# Altium PCB CY8C4245LQI-BoB.PcbDoc
Units mm, origin at the board's own origin, x right, y up, seen from the top; angles counter-clockwise.
Board outline 19.05 x 50.16 mm, 2 copper layers (Top, Bottom), stack 1.67 mm thick; 17 components, 41 nets, 100 pads, 17 vias.
Unrouted connection lines stored in the file: 26.
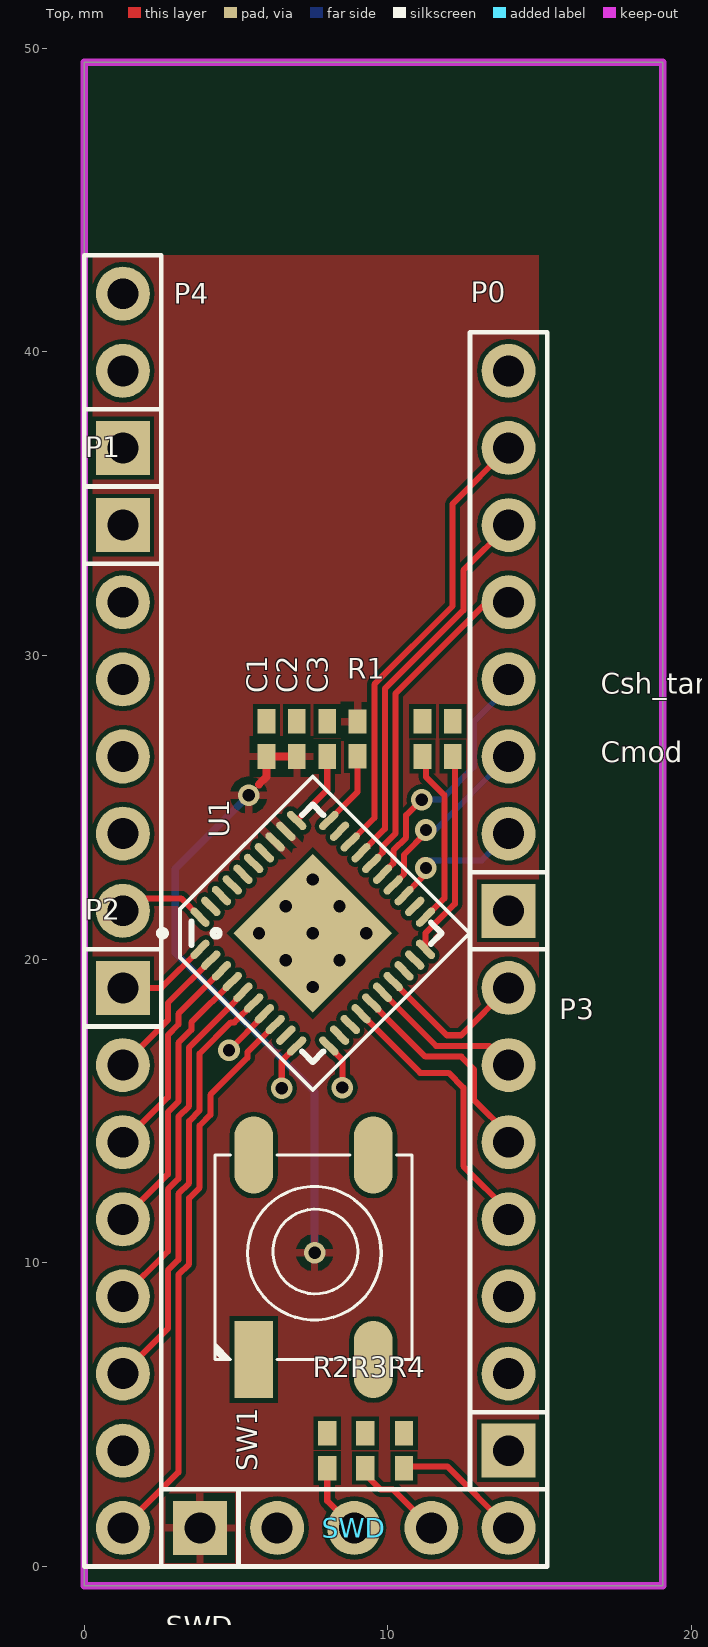
[diagram p0: Top view]
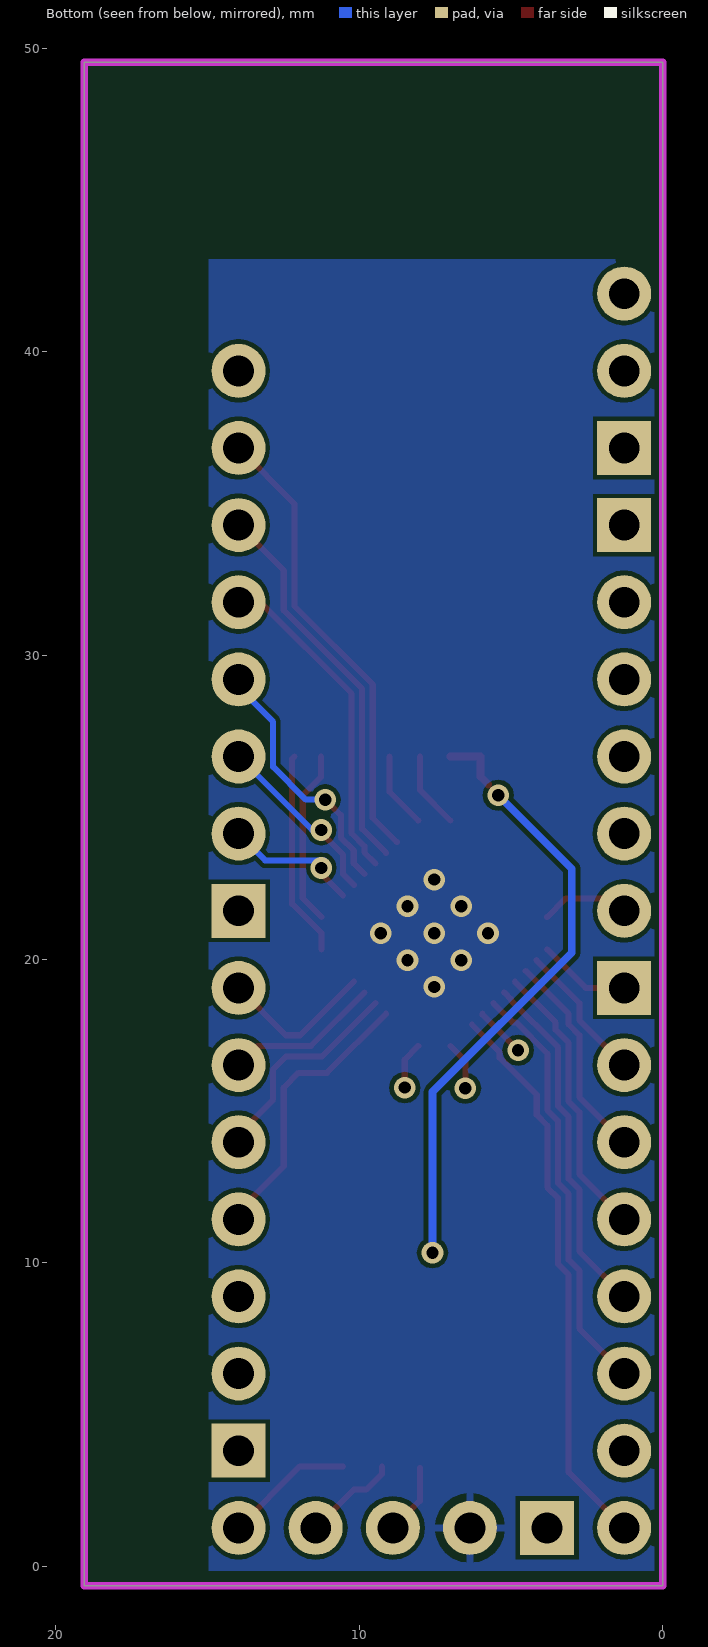
[diagram p1: Bottom view, seen from below]

## Layer stack, top to bottom
Top Solder: solder mask 0.0102, Solder Resist, Dk 3.5
Top: signal copper 0.035
Dielectric1: core 1.6, FR-4, Dk 4.58
Bottom: signal copper 0.035
Bottom Solder: solder mask 0.0102, Solder Resist, Dk 3.5

## Board outline
0,-0.635 0,49.53 19.05,49.53 19.05,-0.635

## Design rules (kind name [scope] priority, off if disabled: settings)
Clearance [All] p1: gap=0.15
Clearance ClearanceViaPad [IsVia vs IsPad] p2: gap=0.1
Clearance ClearanceGNDpolygons [InPolygonClass('GNDpolygons')] p3: gap=0.3
Clearance ClearanceTechnology [All] p4: gap=0.2
ComponentClearance [All] p1: gap=0 collisioncheckmode=3 verticalgap=0.254 showdistances=TRUE
MinimumAnnularRing [All] p1: minimumring=0.2
MinimumSolderMaskSliver MinimumSolderMaskSliver_QFN48 [All] p1: minsoldermaskwidth=0
MinimumSolderMaskSliver [All] p2: minsoldermaskwidth=0.254
PolygonConnect [All] p1: connectstyle=Relief reliefconductorwidth=0.254 reliefentries=4 polygonreliefangle="90 Angle" airgapwidth=0.254
PolygonConnect PolygonConnectVia [IsVia] p2: connectstyle=Direct reliefconductorwidth=0.4 reliefentries=4 polygonreliefangle="90 Angle" airgapwidth=0.254
PolygonConnect PolygonConnectBigPads [(ObjectKind = 'Pad') And ((AsMM(PadXSize_AllLayers) > 2) Or (AsMM(PadYSize_AllLayers) > 2))] p3: connectstyle=Direct reliefconductorwidth=0.4 reliefentries=4 polygonreliefangle="90 Angle" airgapwidth=0.254
PolygonConnect PolygonConnectGeneral [All] p4: connectstyle=Relief reliefconductorwidth=0.3 reliefentries=4 polygonreliefangle="90 Angle" airgapwidth=0.2
RoutingVias [All] p1: holewidth=0.2 width=0.3 viastyle="Through Hole" minholewidth=0.711 minwidth=1.27 maxholewidth=0.711 maxwidth=1.27
SilkToSolderMaskClearance [IsPad] p1: minsilkscreentomaskgap=0.05 clearancetoexposedcopper=TRUE
SilkToSolderMaskClearance SilkscreenOverComponentPads [IsPad] p2: minsilkscreentomaskgap=0.1 clearancetoexposedcopper=FALSE
SolderMaskExpansion [All] p1: expansion=0.102
Width [All] p1: maxlimit=0.406 minlimit=0.152 preferedwidth=0.203
Width WidthTechnology [All] p2: maxlimit=3 minlimit=0.16 preferedwidth=0.6
26 further rules are at their usual default settings.

## Components (designator, comment, footprint, x,y, rotation, side; value= is the part's Value field where it differs from the comment)
C1 "1.0µF" CAPC1005X06N 6,27.25 r90 top
C2 "0.1µF" CAPC1005X06N 7,27.25 r90 top
C3 "1.0µF" CAPC1005X06N 8,27.25 r90 top
Cmod "2200pF" CAPC1005X06N 12.13,27.25 r90 top
Csh_tank "10000pF" CAPC1005X06N 11.136,27.25 r90 top
P0 "HEADER-1X8" HEADER-1X8-100MIL 13.97,21.59 r180 top
P1 "HEADER-1X6" HEADER-1X6-100MIL 1.27,34.29 r0 top
P2 "HEADER-1X8" HEADER-1X8-100MIL 1.27,19.05 r0 top
P3 "HEADER-1X7" HEADER-1X7-100MIL 13.97,3.81 r180 top
P4 "HEADER-1X3" HEADER-1X3-100MIL 1.27,36.83 r180 top
R1 "10k" RESC1005X04N 9,27.25 r270 top
R2 "0.0" RESC1005X04N 8,3.81 r90 top
R3 "0.0" RESC1005X04N 9.25,3.81 r90 top
R4 "0.0" RESC1005X04N 10.528,3.81 r90 top
SW1 "SW-PB6MM-SMD" SW-PB-SMD 5.578,6.814 r90 top
SWD "HEADER-1X5" HEADER-1X5-100MIL 3.81,1.27 r90 top
U1 "CY8C4245LQI-483" CY8C4xxxLQI 3.81,20.32 r45 top

## Footprints (in the part's own frame and the unit in brackets; to place one, negate y for a bottom-side part, rotate by r counter-clockwise, add the part's x,y. Pads: shape width x height; smd on the part's side, far side on the other; paste and mask are expansions set on the pad)
CAPC1005X06N [mm] "Chip Capacitor, 2-Leads, Body 1.00x0.50mm, IPC Medium Density"
  rect 0.82x0.58 smd: 1(-0.58,0) 2(0.58,0)
  body extent -0.52,-0.28 0.53,0.27, height 0.55
CY8C4xxxLQI [mm] "PSOC4 QFN package"
  oval 0.8x0.25 smd mask+0.05: 1(0,0) 2(0,-0.5) 3(0,-1) 4(0,-1.5) 5(0,-2) 6(0,-2.5) 7(0,-3) 8(0,-3.5) 9(0,-4) 10(0,-4.5) 21(6,-4.5) 22(6,-4) 23(6,-3.5) 24(6,-3) 25(6,-2.5) 26(6,-2) 27(6,-1.5) 28(6,-1) 29(6,-0.5) 30(6,0)
  oval 0.25x0.8 smd mask+0.05: 11(0.75,-5.25) 12(1.25,-5.25) 13(1.75,-5.25) 14(2.25,-5.25) 15(2.75,-5.25) 16(3.25,-5.25) 17(3.75,-5.25) 18(4.25,-5.25) 19(4.75,-5.25) 20(5.25,-5.25) 31(5.25,0.75) 32(4.75,0.75) 33(4.25,0.75) 34(3.75,0.75) 35(3.25,0.75) 36(2.75,0.75) 37(2.25,0.75) 38(1.75,0.75) 39(1.25,0.75) 40(0.75,0.75)
  rect 3.7x3.7 smd mask+0.1: EP(3,-2.25)
  silkscreen extent -0.65,-5.9 6.65,1.4, body extent 0,-5.25 6,0.75, height 1
HEADER-1X3-100MIL [mil]
  rect 70x70 hole 40: 1(0,0)
  round 70 hole 40: 2(0,-100) 3(0,-200)
  silkscreen extent -50,-250 50,50, body extent -50,-250 50,50, height 470
HEADER-1X5-100MIL [mil]
  rect 70x70 hole 40: 1(0,0)
  round 70 hole 40: 2(0,-100) 3(0,-200) 4(0,-300) 5(0,-400)
  silkscreen extent -50,-450 50,50, body extent -45,-445 45,45, height 470
HEADER-1X6-100MIL [mil]
  rect 70x70 hole 40: 1(0,0)
  round 70 hole 40: 2(0,-100) 3(0,-200) 4(0,-300) 5(0,-400) 6(0,-500)
  silkscreen extent -50,-550 50,50, body extent -50,-550 50,50, height 470
HEADER-1X7-100MIL [mil]
  rect 70x70 hole 40: 1(0,0)
  round 70 hole 40: 2(0,-100) 3(0,-200) 4(0,-300) 5(0,-400) 6(0,-500) 7(0,-600)
  silkscreen extent -50,-650 50,50, body extent -50,-650 50,50, height 470
HEADER-1X8-100MIL [mil]
  rect 70x70 hole 40: 1(0,0)
  round 70 hole 40: 2(0,-100) 3(0,-200) 4(0,-300) 5(0,-400) 6(0,-500) 7(0,-600) 8(0,-700)
  silkscreen extent -50,-750 50,50, body extent -49,-749 49,49, height 470
RESC1005X04N [mm] "Chip Resistor, 2-Leads, Body 1.00x0.50mm, IPC Medium Density"
  rect 0.8x0.6 smd: 1(-0.575,0) 2(0.575,0)
  body extent -0.53,-0.28 0.53,0.27, height 0.4
SW-PB-SMD [mil]
  rect 100x50 smd: 1(0,0)
  oval 100x50 smd: 2(265,0) 3(0,-155) 4(265,-155)
  silkscreen extent 0,-205 265,50, body extent -28,-206 297,50, height 140

## Part data
C1 C3: library part C0402C105K8PACTU, "CAP CER 1UF 10V 10% X5R 0402"
C2: library part C0402C104K9RACTU, "CAP CER 0.1UF 6.3V 10% X7R 0402"
Cmod: library part C0402C222K4RACTU, "CAP CER 2200PF 16V 10% X7R 0402"
Csh_tank: library part C0402C103K4RACTU, "CAP CER 10000PF 16V 10% X7R 0402"
P0 P2: library part HEADER-1X8-100MIL
P1: library part HEADER-1X6-100MIL
P3: library part HEADER-1X7-100MIL
P4: library part HEADER-1X3-100MIL
R1: library part CRCW040210K0FKED, "RES 10.0K OHM 1/16W 1% 0402 SMD"
R2 R3 R4: library part CRCW04020000Z0ED, "RES 0.0 OHM 1/16W JUMP 0402 SMD"
SW1: "PUSHBUTTON SWITCH 6MM SMD"
SWD: library part CONN-1X5-100MIL-SWD-MiniProg
U1: library part CY8C4245LQI, "PSOC4 IC MCU 32BIT 32KB FLASH 40QFN"

## Via types
v1: diameter 0.711, hole 0.406, Top to Bottom, 17 vias

## Nets (pads, with @x,y where several pads share a name; then routed paths per layer and width w, separated by ;. In a path a pad name is that pad's centre, name@x,y a point inside that pad or via, vN(x,y) a via of type N, cw(c..) or ccw(c..) an arc to the next point about the centre after c; other vN are vias at no path point)
GND: C1.2 C2.2 C3.2 Cmod.2 Csh_tank.2 SW1.4 SWD.2 U1.9 U1.34 U1.EP
  other v1: 7.522,19.083 6.638,19.966 8.406,19.966 5.755,20.85 7.522,20.85 9.29,20.85 6.638,21.734 8.406,21.734 7.522,22.618
NetC3_1: C3.1 U1.31 | length 2.5
  Top w0.2: U1.31 8,25.571 C3.1
NetR2_1: R2.1 SWD.3 | length 2.3
  Top w0.2: R2.1 8,2.16 SWD.3
NetR3_1: R3.1 SWD.4 | length 3.2
  Top w0.2: R3.1@9.25,3.285 9.25,3.04 9.75,2.54 10.16,2.54 SWD.4
NetR4_1: R4.1 SWD.5 | length 4.3
  Top w0.2: R4.1@10.527,3.285 11.965,3.285 13.97,1.28 SWD.5
P0_0: P0.1 U1.22
P0_1: P0.2 U1.23 | length 5.2
  Top w0.2: U1.23 11.136,22.696 11.136,23.25 11.25,23.136 v1(11.25,23)
  Bottom w0.2: v1(11.25,23) 11.25,23.136 11.136,23.25 13.09,23.25 P0.2
P0_2: P0.3 U1.24 | length 6.2
  Top w0.2: U1.24 10.527,22.795 10.527,23.431 11.25,24.154 v1(11.25,24.25)
  Bottom w0.2: v1(11.25,24.25) 11.136,24.25 11.55,24.25 P0.3
P0_3: P0.4 U1.25 | length 8.5
  Top w0.2: U1.25 10.178,23.152 10.178,23.576 10.6,23.999 10.6,24.738 v1(11.112,25.25)
  Bottom w0.2: v1(11.112,25.25) 11.75,25.25 12.831,26.331 12.831,27.809 13.97,28.948 P0.4
P0_4: P0.5 U1.26 | length 10.9
  Top w0.2: U1.26 9.828,23.509 9.828,23.721 10.25,24.144 10.25,28.75 13.25,31.75 P0.5
P0_5: P0.6 U1.27 | length 12.8
  Top w0.2: U1.27 9.9,24.289 9.9,28.75 9.9,28.9 12.481,31.481 12.481,32.801 P0.6
P0_6: P0.7 U1.28 | length 15.1
  Top w0.2: U1.28 9.55,24.646 9.55,28.75 9.55,29.045 12.13,31.625 12.13,34.99 P0.7
P0_7: P0.8 U1.29
P1_0: P1.1 U1.35
P1_1: P1.2 U1.36
P1_2: P1.3 U1.37
P1_3: P1.4 U1.38
P1_4: P1.5 U1.39
P1_7: P1.6 U1.40 | length 3
  Top w0.2: P1.6 1.68,22 3.191,22 U1.40
P2_0: P2.1 U1.1 | length 3.1
  Top w0.2: P2.1 2.54,19.05 U1.1
P2_1: P2.2 U1.2 | length 4.7
  Top w0.2: P2.2 2.75,17.99 2.75,18.553 U1.2
P2_2: P2.3 U1.3 | length 7
  Top w0.2: P2.3 2.75,15.45 2.75,17.495 3.1,17.845 3.1,18.196 U1.3
P2_3: P2.4 U1.4 | length 9.3
  Top w0.2: P2.4 2.75,12.91 2.75,14.955 3.1,15.305 3.1,17.238 3.527,17.665 3.527,17.916 U1.4
P2_4: P2.5 U1.5 | length 11.7
  Top w0.2: P2.5 2.75,10.37 2.75,12.415 3.1,12.765 3.1,14.81 3.45,15.16 3.45,17.093 5,18.643 5,18.682 U1.5
P2_5: P2.6 U1.6 | length 14.1
  Top w0.2: P2.6 2.75,7.83 2.75,9.75 3.1,10.1 3.1,12.27 3.45,12.62 3.45,14.665 3.8,15.015 3.8,16.89 4.826,17.916 4.941,17.916 U1.6
P2_6: P2.7 U1.7 | length 1.7
  Top w0.2: v1(4.766,17) 5.931,18.165 U1.7
P2_7: P2.8 U1.8 | length 18.7
  Top w0.2: P2.8 3.1,3.1 3.1,9.605 3.45,9.955 3.45,12.125 3.8,12.475 3.8,14.52 4.15,14.87 4.15,15.527 5.372,16.749 5.372,16.932 U1.8
P3_0: U1.10 | length 1.6
  Top w0.203: v1(6.5,15.75) 6.5,16.646 U1.10
P3_1: P3.1 U1.11 | length 1.6
  Top w0.203: U1.11 8.5,16.691 v1(8.5,15.769)
P3_4: P3.4 U1.14 | length 9.3
  Top w0.2: U1.14 11.062,16.25 12,16.25 12.481,15.769 12.481,13.181 13.97,11.692 P3.4
P3_5: P3.5 U1.15 | length 7.1
  Top w0.2: U1.15 11.231,16.788 12.412,16.788 12.831,16.369 12.831,15.371 13.97,14.232 P3.5
P3_6: P3.6 U1.16 | length 5.1
  Top w0.2: U1.16 11.588,17.138 13.342,17.138 P3.6
P3_7: P3.7 U1.17 | length 5.2
  Top w0.2: U1.17 11.942,17.492 12.412,17.492 P3.7
P4_0: P4.1 U1.18
P4_1: P4.2 U1.19
P4_2: Cmod.1 P4.3 U1.20 | length 6.8
  Top w0.2: U1.20 11.235,20.85 12.206,21.821 12.206,26.595 Cmod.1
P4_3: Csh_tank.1 U1.21 | length 5.8
  Top w0.2: U1.21 11.856,22.002 11.856,25.394 11.25,26 Csh_tank.1@11.25,26.67
SWDCLK: P3.3 R3.2 U1.13
SWDIO: P3.2 R4.2 U1.12
VCC: C1.1 C2.1 R1.1 SWD.1 U1.32 U1.33 | length 20
  Top w0.254: 5.75,25.75 6,26 C1.1 C2.1
  Bottom w0.254: v1(5.419,25.394) 3,22.976 3,20.211 7.584,15.626 v1(7.584,10.329)
X\R\E\S: R1.2 R2.2 SW1.1 U1.30 | length 2.5
  Top w0.2: U1.30 9,25.51 R1.2
pads on no net: SW1.2 SW1.3
copper on no net: | length 103.1
  Top w0.2: -41.342,72.414 -41.342,74.827 -17.974,74.827 -17.974,72.414 -41.342,72.414
  Bottom w0.2: -41.342,70.001 -41.342,72.414 -17.974,72.414 -17.974,70.001 -41.342,70.001

## Polygon pours and split planes (outlines as drawn)
VCC on Top "Top-VCC" (solid, pour order 5): 0,0 15.24,0 15.24,43.25 15.17,43.18 0,43.18
GND on Bottom "Top-GND" (solid, pour order 4): 0,-0.135 15.24,-0.135 15.24,43.115 15.17,43.045 0,43.045

## Keep-outs
Keep-Out Layer:
  rectangle: -41.342,34.035 -36.516,36.448
  lines w0.2: -41.342,34.035 -41.342,36.448 -17.974,36.448 -17.974,34.035 -41.342,34.035
  lines w0.254: 0,-0.635 19.05,-0.635 19.05,49.53 0,49.53 0,-0.635
  text "ROUTING KEEPOUT LAYER" at -34.738,34.721 h0.89

## Other copper
Top:
  rectangle: -41.342,72.414 -36.516,74.827
  text "TOP LAYER" at -34.738,73.1 h1.02
Bottom:
  rectangle: -41.342,70.001 -36.516,72.414
  text "BOTTOM LAYER" at -34.738,70.687 h1.02
Multi-Layer:
  rectangle: -41.342,49.021 -36.516,51.434
  lines w0.2: -41.342,49.021 -41.342,51.434 -17.974,51.434 -17.974,49.021 -41.342,49.021
  text "MULTILAYER" at -34.738,49.707 h1.02

## Silkscreen, mask and mechanical layers (free items; w line width, h text height)
Top Overlay:
  rectangle: -41.342,78.409 -36.516,80.822
  lines w0.2: -41.342,78.409 -17.974,78.409 -17.974,80.822 -41.342,80.822 -41.342,78.409
  text "TOP OVERLAY" at -34.738,79.094 h1.02
Bottom Overlay:
  rectangle: -41.342,64.007 -36.516,66.42
  lines w0.2: -41.342,64.007 -17.974,64.007 -17.974,66.42 -41.342,66.42 -41.342,64.007
  text "BOTTOM OVERLAY" at -34.738,64.693 h1.02
Top Paste:
  rectangle: -41.342,81.406 -36.516,83.819
  lines w0.2: -41.342,81.406 -41.342,83.819 -17.974,83.819 -17.974,81.406 -41.342,81.406
  text "TOP PASTE" at -34.738,82.092 h1.02
Bottom Paste:
  rectangle: -41.342,61.01 -36.516,63.423
  lines w0.2: -41.342,61.01 -41.342,63.423 -17.974,63.423 -17.974,61.01 -41.342,61.01
  text "BOTTOM PASTE" at -34.738,61.695 h1.02
Top Solder:
  rectangle: -41.342,75.411 -36.516,77.824
  lines w0.2: -41.342,75.411 -17.974,75.411 -17.974,77.824 -41.342,77.824 -41.342,75.411
  text "TOP SOLDER MASK" at -34.738,76.097 h1.02
Bottom Solder:
  rectangle: -41.342,67.004 -36.516,69.417
  lines w0.2: -41.342,67.004 -41.342,69.417 -17.974,69.417 -17.974,67.004 -41.342,67.004
  text "BOTTOM SOLDER MASK" at -34.738,67.69 h1.02
Drill Guide:
  rectangle: -41.342,58.012 -36.516,60.425
  lines w0.2: -41.342,58.012 -17.974,58.012 -17.974,60.425 -41.342,60.425 -41.342,58.012
  text "DRILL GUIDE (SLOTS)" at -34.738,58.698 h1.02
Outline:
  rectangle: -41.342,52.018 -36.516,54.431
  lines w0.2: -41.342,52.018 -17.974,52.018 -17.974,54.431 -41.342,54.431 -41.342,52.018
  lines w0.254: -43.882,117.702 69,117.702 69,112 ; -43.882,122.827 69,122.827 69,117.136 ; -39.056,86.105 -19.498,86.105 ; 33,112 33,117.702 ; 69,122.825 94.975,122.825 ; -43.882,31.825 -43.882,91.693 -15.18,91.693 -15.18,31.825 -43.882,31.825 ; -43.882,112 95,112 95,130.05 -43.882,130.05 -43.882,112
  text ".GlobalProjectName" at -32.125,124.975 h3
  text "Project:" at -42.406,124.816 h1.2
  text ".GlobalProjectTeam" at -34.65,119.3 h2.03
  text ".GlobalProjectLink" at 35.15,119.3 h2.03
  text "Team:" at -42.406,119.225 h1.2
  text "More info:" at 25.35,119.225 h1.2
  text ".Pcb_File_Name_No_Path" at -28,113.934 h2.03
  text "PCB file name:" at -42.406,113.907 h1.2
  text ".GlobalRevisionDate" at 48.119,113.507 h2.03
  text "Rev:" at 71,113.507 h1.2
  text "Revision date:" at 34.944,113.407 h1.2
  text "LAYER USAGE" at -39.056,86.816 h2.03
  text "BOARD OUTLINE" at -34.738,52.704 h1.02
Dimensions:
  rectangle: -41.342,37.032 -36.516,39.445
  lines w0.2: -41.146,-10.834 -23.061,-10.834 ; -41.07,-2.782 -22.985,-2.782 ; -41.07,16.369 -22.985,16.369 ; -41.045,8.673 -22.96,8.673 ; -40.918,19.798 -22.833,19.798 ; -41.342,37.032 -17.974,37.032 -17.974,39.445 -41.342,39.445 -41.342,37.032
  lines w0.254: -42.064,-17.8 -42.064,23.583 -17.908,23.583 -17.908,-17.8 -42.064,-17.8
  text "DIMENSIONS" at -34.738,37.718 h1.02
  text "BUILD STATISTICS" at -40.816,20.586 h1.52
  text "GENERAL" at -41.019,16.877 h1.02
  text ".Net_Count" at -31.342,14.769 h1.02
  text "NETS" at -40.943,14.718 h0.89
  text ".Component_Count" at -31.342,12.686 h1.02
  text "COMPONENTS" at -40.918,12.661 h0.89
  text "PRIMITIVES" at -40.994,9.181 h1.02
  text ".Fill_Count" at -31.342,7.048 h1.02
  text "FILLS" at -40.918,7.022 h0.89
  text ".Track_Count" at -31.342,4.99 h1.02
  text "TRACKS" at -40.918,4.939 h0.89
  text ".String_Count" at -31.342,2.907 h1.02
  text "STRINGS" at -40.918,2.857 h0.89
  text ".Arc_Count" at -31.342,0.799 h1.02
  text "ARC'S" at -40.918,0.748 h0.89
  text "LANDS" at -41.019,-2.274 h1.02
  text ".Pad_Count" at -31.342,-4.408 h1.02
  text ".Pad_Count" at -31.342,-4.408 h1.02
  text "PADS" at -40.918,-4.459 h0.89
  text ".Via_Count" at -31.342,-6.491 h1.02
  text "VIA'S" at -40.892,-6.516 h0.89
  text "PRINT SCALE" at -41.095,-10.326 h1.02
  text ".Print_Scale" at -31.393,-12.485 h1.02
  text "SCALE" at -40.968,-12.51 h0.89
  text ".Print_Date" at -31.393,-14.542 h1.02
  text "PRINT DATE" at -40.943,-14.568 h0.89
  text ".Print_Time" at -31.367,-16.6 h1.02
  text "PRINT TIME" at -40.918,-16.625 h0.89
Ref:
  lines w0.25: 119.824,-28.075 248.576,-28.075 ; 119.824,-23.725 248.576,-23.725 ; 118.3,-48 ccw(c119.7,-48) 119.7,-49.4 248.7,-49.4 ccw(c248.7,-48) 250.1,-48 250.1,-19 ccw(c248.7,-19) 248.7,-17.6 119.7,-17.6 ccw(c119.7,-19) 118.3,-19 118.3,-48
  text ".GlobalProjectRevision" at 75,114 h7
  text "Fusion service size limits" at 131,76.8 h5
  text "5cm X 5cm" at 134,71.802 h5
  text "5cm X 10cm" at 134,68.024 h5
  text "5cm X 15cm" at 134,64.246 h5
  text "5cm X 20cm" at 134,60.468 h5
  text "10cm X 10cm" at 134,56.69 h5
  text "10cm X 15cm" at 134,52.912 h5
  text "10cm X 20cm" at 134,49.134 h5
  text "15cm X 15cm" at 134,45.356 h5
  text "15cm X 20cm" at 134,41.578 h5
  text "20cm X 20cm" at 134,37.8 h5
  text "Layer Stack Up Detail for: 2 Layer Seed Fusion template" at 119.824,-22.178 h2.05
  text "Layer" at 119.824,-25.35 h1
  text "Gerber" at 147.375,-25.35 h1
  text "Copper" at 161.317,-25.35 h1
  text "Dielectric" at 176.892,-25.35 h1
  text "Dielectric" at 193.166,-25.35 h1
  text "Dielectric" at 213.72,-25.35 h1
  text "Dielectric" at 229.994,-25.35 h1
  text "Name" at 119.824,-27.35 h1
  text "Document" at 147.375,-27.35 h1
  text "Thickness" at 161.317,-27.35 h1
  text "Height" at 176.892,-27.35 h1
  text "Material" at 193.166,-27.35 h1
  text "Constant" at 213.72,-27.35 h1
  text "Type" at 229.994,-27.35 h1
  text "Top Solder Mask" at 119.824,-31.222 h1.4
  text "(.GTS)" at 147.375,-31.222 h1.4
  text "0.0102mm" at 176.892,-31.222 h1.4
  text "Solder Resist" at 193.166,-31.222 h1.4
  text "3.50" at 213.72,-31.222 h1.4
  text "Top" at 119.824,-35.252 h1.4
  text "(.GTL)" at 147.375,-35.252 h1.4
  text "0.035mm" at 161.317,-35.252 h1.4
  text "1.6mm" at 176.892,-37.267 h1.4
  text "FR-4" at 193.166,-37.267 h1.4
  text "4.58" at 213.72,-37.267 h1.4
  text "Core" at 229.994,-37.267 h1.4
  text "Bottom" at 119.824,-39.282 h1.4
  text "(.GBL)" at 147.375,-39.282 h1.4
  text "0.035mm" at 161.317,-39.282 h1.4
  text "Bottom Solder Mask" at 119.824,-43.312 h1.4
  text "(.GBS)" at 147.375,-43.312 h1.4
  text "0.0102mm" at 176.892,-43.312 h1.4
  text "Solder Resist" at 193.166,-43.312 h1.4
  text "3.50" at 213.72,-43.312 h1.4
Assembly Top:
  rectangle: -41.342,46.024 -36.516,48.437
  lines w0.2: -41.342,46.024 -41.342,48.437 -17.974,48.437 -17.974,46.024 -41.342,46.024
  text "TOP ASSEMBLY" at -34.738,46.709 h1.02
Assembly Bot:
  rectangle: -41.342,43.026 -36.516,45.439
  lines w0.2: -41.342,43.026 -41.342,45.439 -17.974,45.439 -17.974,43.026 -41.342,43.026
  text "BOTTOM ASSEMBLY" at -34.738,43.712 h1.02
Drill Drawing:
  rectangle: -41.342,55.015 -36.516,57.428
  lines w0.025: -0.319,-43.231 0.316,-43.866 0.951,-43.231 0.316,-42.596 -0.319,-43.231 ; -0.319,-40.056 0.951,-40.056 0.951,-38.786 -0.319,-38.786 -0.319,-40.056
  lines w0.2: -41.342,55.015 -41.342,57.428 -17.974,57.428 -17.974,55.015 -41.342,55.015
  lines w0.381: -2.05,-45.009 96.476,-45.009 ; -2.05,-37.389 96.476,-37.389 ; 11.943,-48.819 11.943,-33.579 ; 29.667,-48.819 29.667,-33.579 ; 63.846,-48.819 63.846,-33.579 ; 76.695,-48.819 76.695,-33.579 ; -2.05,-48.819 96.476,-48.819 96.476,-33.579 -2.05,-33.579 -2.05,-48.819
  text "DRILL DRAWING" at -34.738,55.701 h1.02
  text "Symbol" at 0.236,-36.246 h1.83
  text "Hit Count" at 13.086,-36.246 h1.83
  text "Finished Hole Size" at 30.81,-36.246 h1.83
  text "Plated" at 64.989,-36.246 h1.83
  text "Hole Type" at 77.838,-36.246 h1.83
  text "17" at 13.086,-40.056 h1.52
  text "0.4mm" at 30.81,-40.056 h1.52
  text "PTH" at 64.989,-40.056 h1.52
  text "Round" at 77.838,-40.056 h1.52
  text "37" at 13.086,-43.866 h1.52
  text "1.0mm" at 30.81,-43.866 h1.52
  text "PTH" at 64.989,-43.866 h1.52
  text "Round" at 77.838,-43.866 h1.52
  text "54 Total" at 13.086,-47.676 h1.52